# Altium PCB Sch_cube_v3.PcbDoc
Units mil, origin at the board's own origin, x right, y up, seen from the top; angles counter-clockwise.
Board outline 3937.01 x 3937.01 mil, 2 copper layers (Top Layer, Bottom Layer); 58 components, 51 nets, 393 pads, 229 vias.
Unrouted connection lines stored in the file: 53.
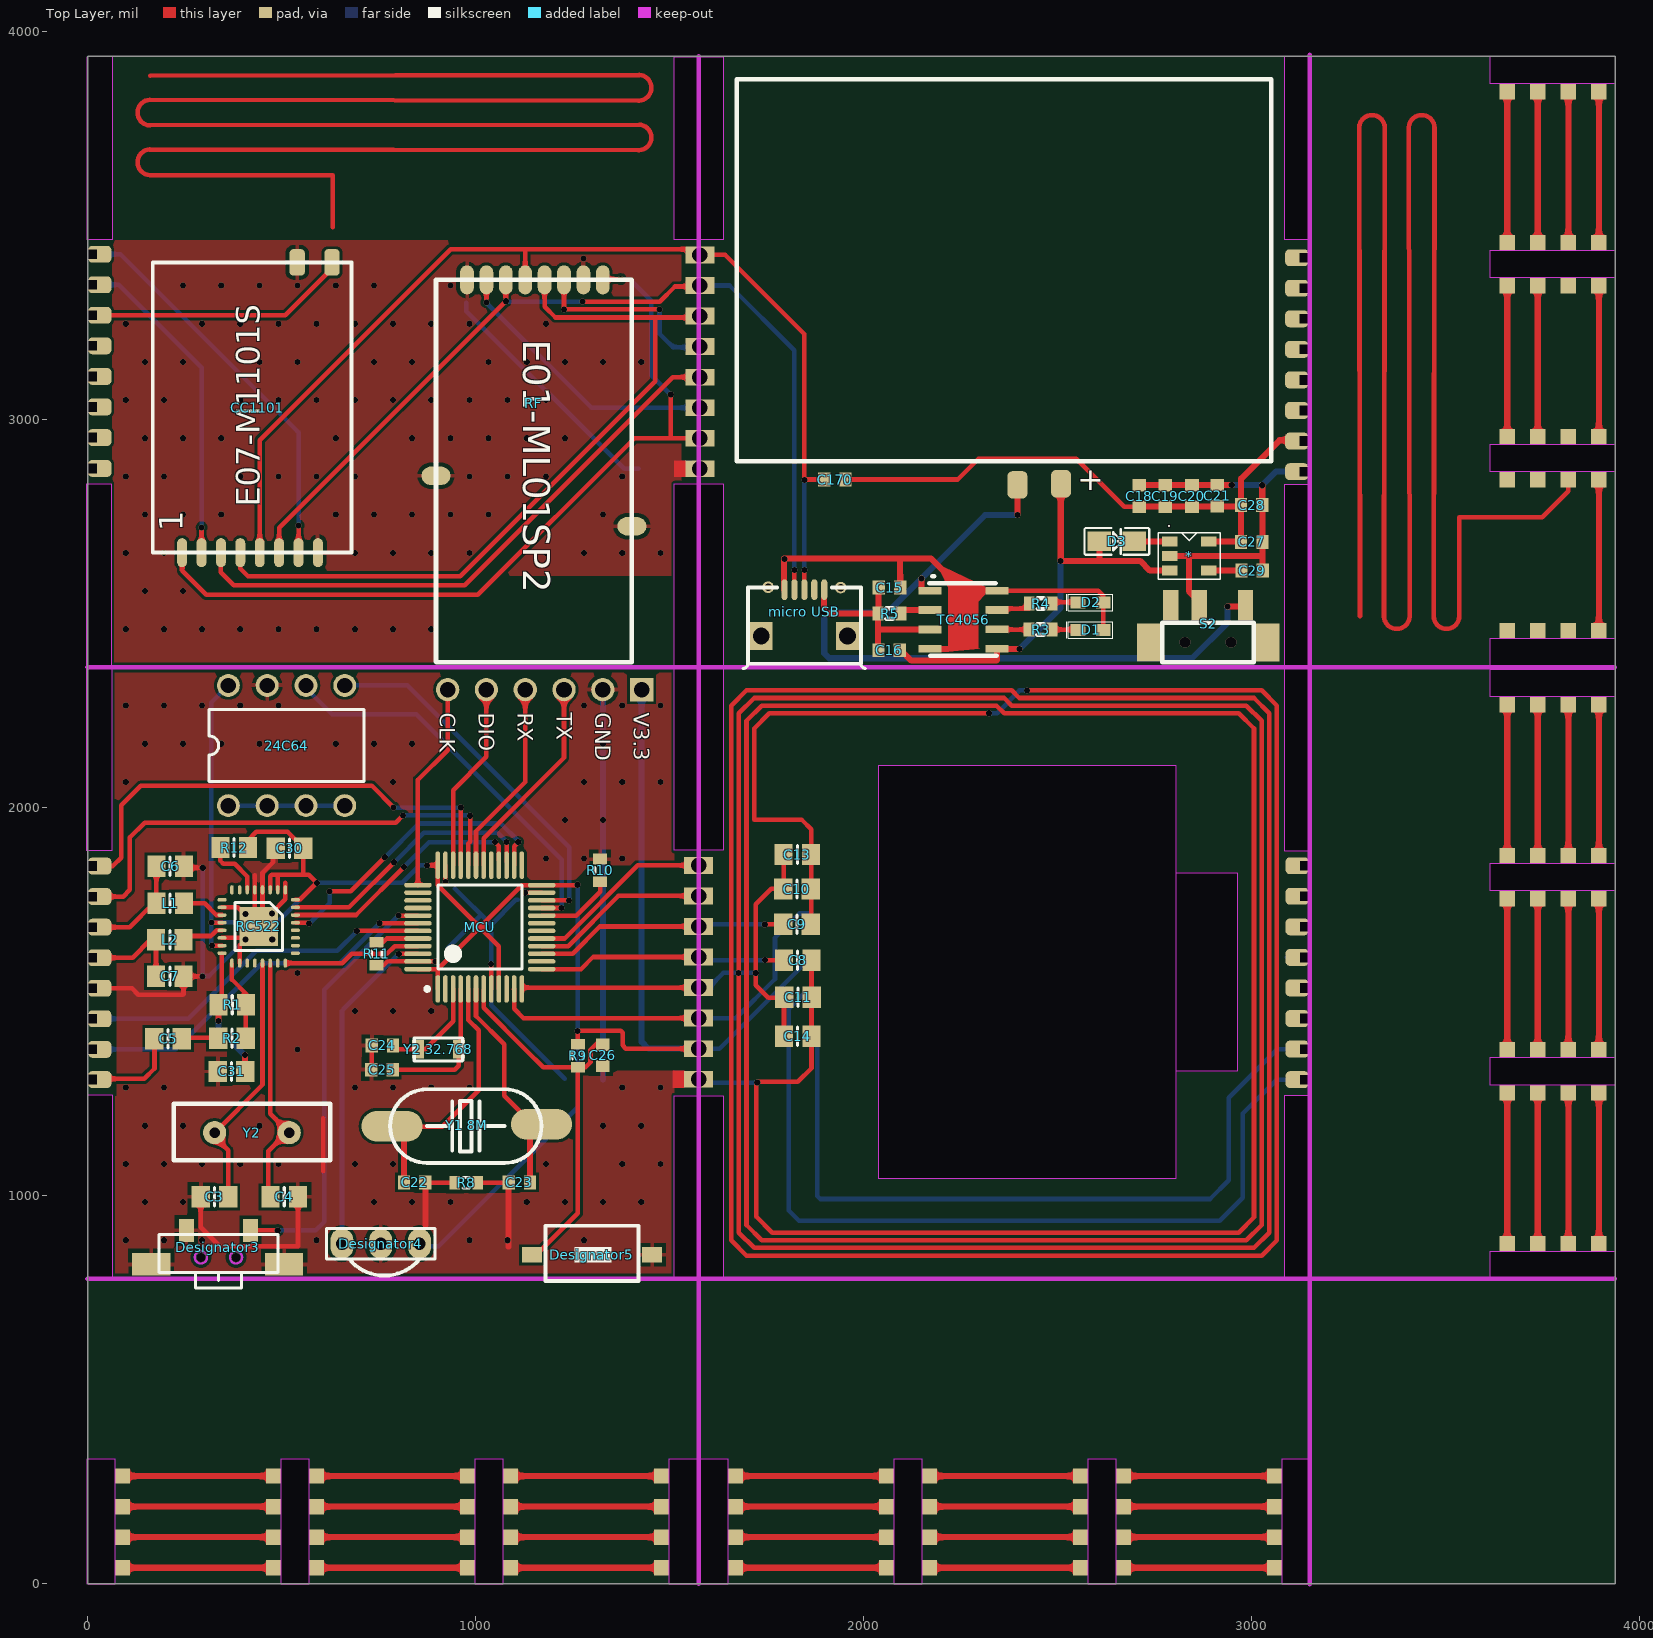
[diagram p0: Top Layer view]
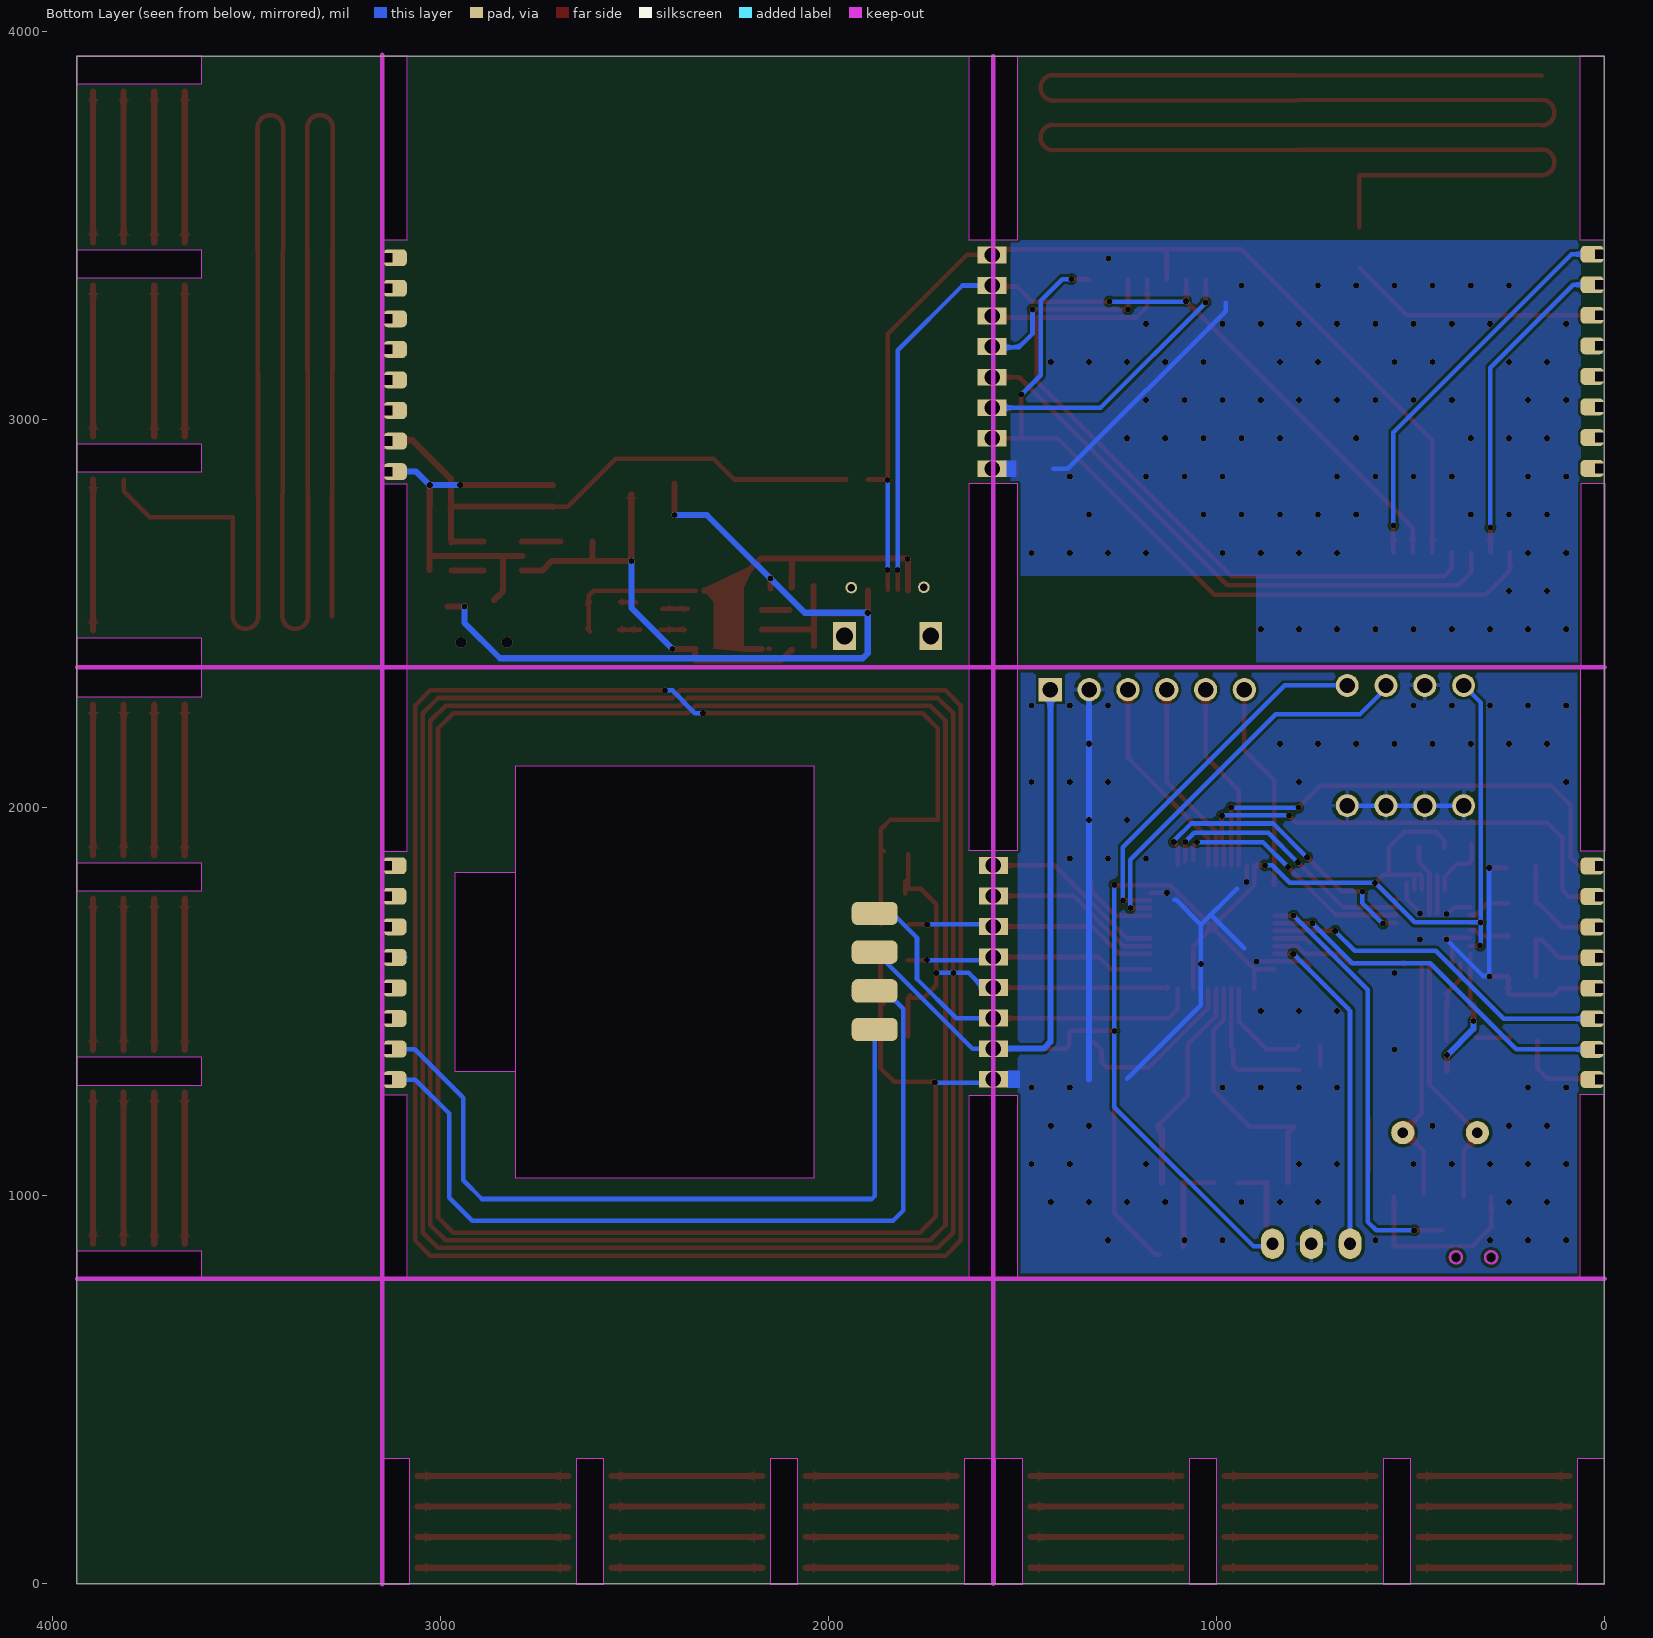
[diagram p1: Bottom Layer view, seen from below]

## Layer stack, top to bottom
Top Solder: solder mask 0.4, Solder Resist, Dk 3.5
Top Layer: signal copper 1.4
Dielectric1: dielectric 12.6, FR-4, Dk 4.8
Bottom Layer: signal copper 1.4
Bottom Solder: solder mask 0.4, Solder Resist, Dk 3.5

## Board outline
0,0 3937.01,0 3937.01,3937.01 0,3937.01
cut-out: 2806.1,1321.85 2806.1,1833.66 2963.58,1833.66 2963.58,1321.85
cut-out: 2038.39,1046.26 2806.1,1046.26 2806.1,2109.25 2038.39,2109.25
cut-out: 1512.03,786.22 1512.03,1258.66 1512.02,1258.22 1638,1258.22 1638,785.78 1638.02,786.22
cut-out: 1512.03,3464.22 1512.03,3936.66 1512.02,3936.22 1638,3936.22 1638,3463.78 1638.02,3464.22
cut-out: 1512.03,1890.44 1512.03,2835.32 1512.02,2835.44 1638,2835.44 1638,1890.56 1638.02,1890.44
cut-out: 3086,786.78 3086,1259.22 3086.98,1259.78 3149.97,1259.78 3149.97,787.34 3148.99,786.78
cut-out: 3085.03,3464.22 3085.03,3936.66 3086.01,3937.22 3149,3937.22 3149,3464.78 3148.02,3464.22
cut-out: -0.47,3464 -0.47,3936.44 0.5,3937 63.5,3937 63.5,3464.56 62.52,3464
cut-out: 0,787.78 0,1260.22 0.98,1260.78 63.97,1260.78 63.97,788.34 62.99,787.78
cut-out: 1579,-0.66 1579,322.17 1649.87,322.17 1650,322.42 1650,-0.42
cut-out: 2079,-0.66 2079,322.17 2149.87,322.17 2150,322.42 2150,-0.42
cut-out: 2579,-0.66 2579,322.17 2649.87,322.17 2650,322.42 2650,-0.42
cut-out: 3079,-0.66 3079,322.17 3149.87,322.17 3150,322.42 3150,-0.42
cut-out: 1499,-0.66 1499,322.17 1569.87,322.17 1570,322.42 1570,-0.42
cut-out: 999,-0.66 999,322.17 1069.87,322.17 1070,322.42 1070,-0.42
cut-out: 499,-0.66 499,322.17 569.87,322.17 570,322.42 570,-0.42
cut-out: -1,-0.66 -1,322.17 69.87,322.17 70,322.42 70,-0.42
cut-out: -1.97,1889.22 -1.97,2361.66 -0.99,2362.22 62,2362.22 62,1889.78 61.02,1889.22
cut-out: -2.5,2362 -2.5,2834.44 -1.52,2835 61.47,2835 61.47,2362.56 60.5,2362
cut-out: 3086,1888.78 3086,2361.22 3086.98,2361.78 3149.97,2361.78 3149.97,1889.34 3148.99,1888.78
cut-out: 3086.03,2361.44 3086.03,2833.88 3087.01,2834.44 3150,2834.44 3150,2362 3149.02,2361.44
cut-out: 3937.66,786 3614.83,786 3614.83,856.87 3614.58,857 3937.42,857
cut-out: 3937.66,1286 3614.83,1286 3614.83,1356.87 3614.58,1357 3937.42,1357
cut-out: 3937.66,1786 3614.83,1786 3614.83,1856.87 3614.58,1857 3937.42,1857
cut-out: 3937.66,2286 3614.83,2286 3614.83,2356.87 3614.58,2357 3937.42,2357
cut-out: 3937.66,3866 3614.83,3866 3614.83,3936.87 3614.58,3937 3937.42,3937
cut-out: 3937.66,3366 3614.83,3366 3614.83,3436.87 3614.58,3437 3937.42,3437
cut-out: 3937.66,2866 3614.83,2866 3614.83,2936.87 3614.58,2937 3937.42,2937
cut-out: 3937.66,2366 3614.83,2366 3614.83,2436.87 3614.58,2437 3937.42,2437

## Design rules (kind name [scope] priority, off if disabled: settings)
AssemblyTestPointUsage [All] p1 off:
AssemblyTestpoint [All] p1 off: testpointundercomponent=TRUE minsize=40 maxsize=100 preferedsize=60 minholesize=0 maxholesize=40 preferedholesize=32 testpointgrid=1 usegrid=TRUE gridtolerance=0.01 allowsidetop=TRUE allowsidebottom=TRUE
Clearance [All] p1: gap=7.87 ignorepadtopadclearanceinfootprint=FALSE except(0: Arc-Hole Track-Hole SMDPad-Hole THPad-Hole Via-Hole Fill-Hole Poly-Hole Region-Hole Text-Hole)
ComponentClearance [All] p1 off: gap=10 collisioncheckmode=3 verticalgap=10 showdistances=FALSE
DiffPairsRouting [All] p1 off: maxlimit=10 minlimit=10 mostfreqgap=10 toplayer_minwidth=15 toplayer_maxwidth=15 toplayer_prefwidth=15 bottomlayer_minwidth=15 bottomlayer_maxwidth=15 bottomlayer_prefwidth=15 maxuncoupledlength=500
FabricationTestPointUsage [All] p1 off: valid=0 allowmultiple=FALSE
FabricationTestpoint [All] p1 off: side=3 testpointundercomponent=TRUE minsize=40 maxsize=100 preferedsize=60 minholesize=0 maxholesize=40 preferedholesize=32 testpointgrid=1 allowsidetop=TRUE allowsidebottom=TRUE usegrid=TRUE gridtolerance=0.01
FanoutControl Fanout_BGA [IsBGA] p1 off: bgadir=Out bgaviamode=Centered fanoutstyle=Auto fanoutdirection=Alternating viagrid=1 // Fanout_BGA (Default Rule)
FanoutControl Fanout_LCC [IsLCC] p2 off: bgadir=Out bgaviamode=Centered fanoutstyle=Auto fanoutdirection=Alternating viagrid=1 // Fanout_LCC (Default Rule)
FanoutControl Fanout_SOIC [IsSOIC] p3 off: bgadir=Out bgaviamode=Centered fanoutstyle=Auto fanoutdirection=Alternating viagrid=1 // Fanout_SOIC (Default Rule)
FanoutControl Fanout_Small [(CompPinCount < 5)] p4 off: bgadir=Out bgaviamode=Centered fanoutstyle=Auto fanoutdirection=OutThenIn viagrid=1 // Fanout_Small (Default Rule)
FanoutControl Fanout_Default [All] p5 off: bgadir=Out bgaviamode=Centered fanoutstyle=Auto fanoutdirection=Alternating viagrid=1 // Fanout_Default (Default Rule)
Height [All] p1 off: minheight=0 maxheight=1000 prefheight=500
HoleSize [All] p1 off: absolutevalues=TRUE maxlimit=100 minlimit=1 maxpercent=80.000 minpercent=20.000
HoleToHoleClearance [All] p1 off: gap=10 allowstackedmicrovias=TRUE
LayerPairs [All] p1 off: enforce=TRUE
MinimumSolderMaskSliver [All] p1 off: minsoldermaskwidth=10
NetAntennae [All] p1 off: netantennaetolerance=0
PasteMaskExpansion [All] p1 off: expansion=0
PlaneConnect [InNet('GND')] p1: planeconnectstyle=Relief reliefexpansion=20 reliefentries=4 reliefconductorwidth=10 reliefairgap=10
PolygonConnect [All] p1: thpad.connectstyle=Relief thpad.reliefconductorwidth=10 thpad.reliefentries=4 thpad.polygonreliefangle="90 Angle" thpad.airgapwidth=10 smdpad.connectstyle=Relief smdpad.reliefconductorwidth=10 smdpad.reliefentries=4 smdpad.polygonreliefangle="90 Angle" smdpad.airgapwidth=10 via.connectstyle=Direct via.reliefconductorwidth=10 via.reliefentries=4 via.polygonreliefangle="45 Angle" via.airgapwidth=10
RoutingCorners [All] p1 off: cornerstyle=45-Degree minsetback=100 maxsetback=100
RoutingLayers [All] p1 off: top layer_v5=TRUE bottom layer_v5=TRUE
RoutingPriority [All] p1 off: routingpriority=0
RoutingTopology [All] p1 off: topology=Shortest
RoutingVias [All] p1 off: holewidth=28 width=50 viastyle="Through Hole" minholewidth=28 minwidth=50 maxholewidth=28 maxwidth=50
ShortCircuit [All] p1 off: allowed=FALSE
SilkToSilkClearance [All] p1 off: silktosilkclearance=10
SilkToSolderMaskClearance [IsPad] p1 off: minsilkscreentomaskgap=10 clearancetoexposedcopper=TRUE
SolderMaskExpansion [All] p1 off: expansion=4
UnRoutedNet [All] p1 off:
UnpouredPolygon [All] p1 off:
Width [All] p1 off: maxlimit=10 minlimit=10 preferedwidth=10
2 further rules are at their usual default settings.

## Classes and differential pairs
component class Sheet1: 24C64 * C3 C4 C5 C6 C7 C8 C9 C10 C11 C13 C14 C15 C16 C18 C19 C20 C21 C22 C23 C24 C25 C26 C27 C28 C29 C30 C31 CC1101 D1 D2 D3 L1 L2 MCU "micro USB" R1 R2 R3 R4 R5 R8 R9 R10 R11 R12 RC522 RF S2 TC4056 U? "Y1 8M" Y2 "Y2 32.768"

## Components (designator, comment, footprint, x,y, rotation, side; value= is the part's Value field where it differs from the comment)
24C64 "24C64" 24C64 363,2006 r90 top
* "RT9103" SOT23-5 2839.19,2649 r90 top
C3 "" 6-0805_N 327,998 r180 top value=15pF
C4 "" 6-0805_N 507,998 r0 top value=15pF
C5 "Cap Semi" 6-0805_N 207.68,1405.51 r180 top value=104pF
C6 "Cap Semi" 6-0805_N 213,1850 r180 top value=47pF
C7 "Cap Semi" 6-0805_N 212,1566 r180 top value=47pF
C8 "" 6-0805_N 1830.3,1608 r0 top value=15pF
C9 "" 6-0805_N 1828.3,1700 r0 top value=15pF
C10 "" 6-0805_N 1828.3,1791 r0 top value=180pF
C11 "" 6-0805_N 1831.3,1512 r180 top value=180pF
C13 "" 6-0805_N 1829.3,1880 r0 top value=10pF
C14 "" 6-0805_N 1830.3,1412 r180 top value=10pF
C15 "" 1608[0603] 2066.93,2567.91 r180 top value=10uF
C16 "" 1608[0603] 2065.94,2406.5 r180 top value=10uF
C18 "" 1608[0603] 2710.24,2803.87 r270 top value=0.1uF
C19 "" 1608[0603] 2777.24,2803.87 r270 top value=0.1uF
C20 "" 1608[0603] 2846.24,2803.87 r270 top value=0.1uF
C21 "" 1608[0603] 2911.24,2804.87 r270 top value=1uF
C22 "" 1608[0603] 843,1035 r180 top value=22pF
C23 "" 1608[0603] 1113,1035 r0 top value=22pF
C24 "" 1608[0603] 760,1388 r0 top value=22pF
C25 "" 1608[0603] 759,1325 r0 top value=22pF
C26 "" 1608[0603] 1327.76,1362.2 r90 top value=0.1uF
C27 "" 1608[0603] 3000.43,2685.65 r0 top value=0.1uF
C28 "" 1608[0603] 3000,2780.51 r0 top value=1uF
C29 "" 1608[0603] 3001.43,2611.83 r180 top value=2.2nF
C30 "" 6-0805_N 520.67,1895.67 r180 top value=2.2nF
C31 "" 6-0805_N 371.06,1320.87 r0 top value=2.2nF
C170 "" 1608[0603] 1926.18,2846.46 r0 top value=10uF (schematic designator C17)
CC1101 "Component_1" CC1101 680,2658 r90 top
D1 "LED3" 标准1608(C0603) 2586.04,2459.72 r180 top
D2 "LED3" 标准1608(C0603) 2586.04,2530.59 r180 top
D3 "D Zener" 0805D 2647.64,2687.01 r0 top
Designator3 "Comment" SW3 254.92,911.42 r0 top
Designator4 "Comment" IR立式 655.51,876.97 r0 top
Designator5 "Comment" 贴片按键 1180.12,923.23 r0 top
L1 "Inductor" 6-0805_N 213,1754 r0 top value=2.2uH
L2 "Inductor" 6-0805_N 212,1660 r0 top value=2.2uH
MCU "STM32F100C8T6B" LQFP48_N 1011,1693 r90 top
"micro USB" "Component_1" "micro USB" 1847.44,2502.95 r180 top
R1 "Res3" 6-0805_N 373,1493 r0 top value=820R
R2 "Res3" 6-0805_N 372.05,1406.5 r180 top value=5.1K
R3 "Res3" J1-0603 2456.12,2459.72 r0 top value=1K
R4 "Res3" J1-0603 2456.33,2526.78 r0 top value=1K
R5 "Res3" J1-0603 2066.93,2500.98 r180 top value=1.2K
R8 "Res3" J1-0603 976,1034 r0 top value=10M
R9 "Res3" J1-0603 1263.78,1361.22 r270 top value=10K
R10 "Res3" J1-0603 1321,1839 r90 top value=1.5K
R11 "Res3" J1-0603 745,1624 r270 top value=10K
R12 "Res3" 6-0805_N 378,1898.05 r180 top value=10K
RC522 "" RC522 510,1789 r270 top
RF "Component_1" E01-ML01SP2 898,2377 r0 top
S2 "SW-SPST" 拨动开关 2887.8,2425.2 r0 top
TC4056 "Component_1" TC4056电源IC 2171.26,2560.04 r270 top
"Y1 8M" "XTAL" 49SMD 975,1180 r0 top
Y2 "27MHz" 直插晶振 620,1246 r180 top
"Y2 32.768" "XTAL" 32.768K晶振 842,1348 r0 top

## Footprints (in the part's own frame and the unit in brackets; to place one, negate y for a bottom-side part, rotate by r counter-clockwise, add the part's x,y. Pads: shape width x height; smd on the part's side, far side on the other; paste and mask are expansions set on the pad)
6-0805_N [mm] "Chip Resistor, Body 2.0x1.2mm, IPC Medium Density"
  rect 1.2x1.4 smd: 1(-0.9,0) 2(0.9,0)
  silkscreen extent 0,-0.6 0,0.6, body extent -1.07,-0.7 1.07,0.7, height 0.7
24C64 [mm]
  round 1.5 hole 1: 1(0,0) 2(0,-2.54) 3(0,-5.08) 4(0,-7.62) 5(7.87,-7.62) 6(7.87,-5.08) 7(7.87,-2.54) 8(7.87,0)
  silkscreen extent 1.58,-8.89 6.29,1.27
32.768K晶振 [mil]
  rect 31.5x47.24 smd: 1(10,30) 2(115,30)
  silkscreen extent 0,0 125,59
49SMD [mm]
  oval 4x2 smd: 1(-4.826,0) 2(4.953,0.127)
  silkscreen extent -4.95,-2.41 4.95,2.41
0805D [mil]
  rect 60x50 smd: 1(-40,0) 2(50,0)
  silkscreen extent -78,-34 89,34
1608[0603] [mm] "Chip Capacitor, Body 1.6x0.8mm, IPC High Density"
  rect 0.8x0.9 smd: 1(-0.7,0) 2(0.7,0)
  body extent -0.87,-0.48 0.87,0.48, height 1.3
CC1101 [mm]
  oval 1.9x0.65 smd: 2(0,11.08) 2(0,9.81) 2(0,8.54) 2(0,7.27) 2(0,6) 2(0,4.73) 2(0,3.46) 2(0,2.19)
  rrect50% 1.73x1 smd: 2(19,1.27) 2(19,3.548)
  silkscreen extent 0,0 19,13
E01-ML01SP2 [mm]
  oval 0.9x1.9 smd: 0(2.032,24.994) 0(3.302,24.994) 0(4.572,24.994) 0(5.842,24.994) 0(7.112,24.994) 0(8.382,24.994) 0(9.652,24.994) 0(10.922,24.994)
  oval 1.9x1.2 smd: 1(0,12.167) 1(12.827,8.865)
  silkscreen extent 0,-0.03 12.83,24.99
IR立式 [mm]
  oval 1.5x2 hole 0.8: 1(0,0) 2(2.54,0) 3(5.08,0)
  silkscreen extent -1,-2.09 6.1,1
J1-0603 [mm] "Chip Resistor, Body 1.6x0.8mm, IPC High Density"
  rect 0.7x0.9 smd: 1(-0.75,0) 2(0.75,0)
  silkscreen extent -0.2,-0.35 0.2,0.35, body extent -0.85,-0.48 0.85,0.48, height 0.9
LQFP48_N [mm]
  oval 1.8x0.3 smd: 1(-4.05,2.75) 2(-4.05,2.25) 3(-4.05,1.75) 4(-4.05,1.25) 5(-4.05,0.75) 6(-4.05,0.25) 7(-4.05,-0.25) 8(-4.05,-0.75) 9(-4.05,-1.25) 10(-4.05,-1.75) 11(-4.05,-2.25) 12(-4.05,-2.75) 25(4.05,-2.75) 26(4.05,-2.25) 27(4.05,-1.75) 28(4.05,-1.25) 29(4.05,-0.75) 30(4.05,-0.25) 31(4.05,0.25) 32(4.05,0.75) 33(4.05,1.25) 34(4.05,1.75) 35(4.05,2.25) 36(4.05,2.75)
  oval 0.3x1.8 smd: 13(-2.75,-4.05) 14(-2.25,-4.05) 15(-1.75,-4.05) 16(-1.25,-4.05) 17(-0.75,-4.05) 18(-0.25,-4.05) 19(0.25,-4.05) 20(0.75,-4.05) 21(1.25,-4.05) 22(1.75,-4.05) 23(2.25,-4.05) 24(2.75,-4.05) 37(2.75,4.05) 38(2.25,4.05) 39(1.75,4.05) 40(1.25,4.05) 41(0.75,4.05) 42(0.25,4.05) 43(-0.25,4.05) 44(-0.75,4.05) 45(-1.25,4.05) 46(-1.75,4.05) 47(-2.25,4.05) 48(-2.75,4.05)
  silkscreen extent -4.17,-2.75 2.75,3.57
"micro USB" [mm]
  oval 0.4x1.35 smd: 1(-1.3,-1.515) 2(-0.65,-1.515) 3(0,-1.515) 4(0.65,-1.515) 5(1.3,-1.515)
  rect 1.5x1.85 hole 1.1: 6(2.825,1.515) 8(-2.825,1.515)
  round 0.762 hole 0.5: 21(-2.375,-1.65) 21(2.375,-1.675)
  silkscreen extent -4,-1.66 4,3.63
RC522 [mm]
  oval 0.6x0.23 smd: 1(0,0) 2(0,-0.5) 3(0,-1) 4(0,-1.5) 5(0,-2) 6(0,-2.5) 7(0,-3) 8(0,-3.5) 17(4.8,-3.5) 18(4.8,-3) 19(4.8,-2.5) 20(4.8,-2) 21(4.8,-1.5) 22(4.8,-1) 23(4.8,-0.5) 24(4.8,0)
  oval 0.23x0.6 smd: 9(0.65,-4.15) 10(1.15,-4.15) 11(1.65,-4.15) 12(2.15,-4.15) 13(2.65,-4.15) 14(3.15,-4.15) 15(3.65,-4.15) 16(4.15,-4.15) 25(4.15,0.65) 26(3.65,0.65) 27(3.15,0.65) 28(2.65,0.65) 29(2.15,0.65) 30(1.65,0.65) 31(1.15,0.65) 32(0.65,0.65)
  rect 2.54x2.54 smd: 21(2.4,-1.75)
  silkscreen extent 0.83,-3.31 3.96,-0.18
SOT23-5 [mil]
  rect 26x40 smd: 1(37.4,50) 2(0,50) 3(-37.4,50) 4(-37.4,-50) 5(37.4,-50)
  silkscreen extent -60,-80 60,80
SW3 [mm]
  rect 1x1.5 smd: 1(0,0) 2(4.19,0)
  rect 2.5x1.5 smd: 3(-2.305,-2.217) 4(6.395,-2.217)
  Keep-Out Layer circle w0.15: c3.245,-1.767 r0.4
  Keep-Out Layer circle w0.15: c0.945,-1.767 r0.4
  silkscreen extent -1.8,-3.77 6,-0.27
TC4056电源IC [mm]
  rect 0.5x1.5 smd: 1(0,0) 2(1.27,0) 3(2.54,0) 4(3.81,0) 5(3.805,4.375) 6(2.535,4.375) 7(1.265,4.375) 8(-0.005,4.375)
  silkscreen extent -0.95,-0.06 4.25,4.36
拨动开关 [mm]
  rect 1.524x2.5 smd: 26(-3.9,0.025) 26(3.9,0.025)
  rect 1x2 smd: 27(-2.45,2.475) 27(-0.575,2.475) 27(2.45,2.475)
  silkscreen extent -3,-1.28 3,1.33
标准1608(C0603) [mm]
  rect 0.965x0.8 smd: 1(-0.8,0.025) 2(0.85,0.025)
  silkscreen extent -1.43,-0.53 1.6,0.58
直插晶振 [mm]
  round 1.524 hole 0.7: 21(2.55,2.1) 21(7.43,2.1)
  silkscreen extent -0.15,0.2 10.1,3.9
贴片按键 [mm]
  rect 1.3x1 smd: 1(6.985,-1.905) 2(-0.889,-1.905)
  silkscreen extent 0,-3.62 6.1,0

## Part data
C3 C4 C8 C9 C10 C11 C13 C14 C15 C16 C18 C19 C20 C21 C22 C23 C24 C25 C26 C27 C28 C29 C30 C31 C170: library part "Cap Semi", "Capacitor (Semiconductor SIM Model)", LatestRevisionDate=29-May-2009, LatestRevisionNote="IPC-7351 Footprint Added.", PackageDescription="Chip Capacitor", PackageReference=C1206, Published=8-Jun-2000, Publisher="Altium Limited"
C5 C6 C7: "Capacitor (Semiconductor SIM Model)", LatestRevisionDate=29-May-2009, LatestRevisionNote="IPC-7351 Footprint Added.", PackageDescription="Chip Capacitor", PackageReference=C1206, Published=8-Jun-2000, Publisher="Altium Limited"
D1 D2: "Typical BLUE SiC LED", DatasheetVersion=16-Apr-2002, LatestRevisionDate=17-Dec-2003, LatestRevisionNote="PCB Footprint replaced.", PackageDescription="SM LED; 2 C-Bend Leads; Body 3.5 x 2.8 x 1.9 mm, inc leads (LxWxH typ)", PackageReference=3.5X2.8X1.9, PackageVersion=16-Apr-2002, Published=8-Jun-2000, Publisher="Altium Limited"
D3: "Zener Diode", LatestRevisionDate=17-Jul-2002, LatestRevisionNote="Re-released for DXP Platform.", PackageDescription="Diode, Thru-Hole; 2 Leads; 0.7 in Pin Spacing", PackageReference=DIODE-0.7, Published=8-Jun-2000, Publisher="Altium Limited"
MCU: "ARM Cortex-M3 32-bit MCU, 64 KB Flash, 8 KB Internal RAM, 37 I/Os, 48-pin LQFP, -40 to 85 degC, Tray", I/Os (High Current)=37, Operating Frequency(F) (Processor speed) (MHz)=24, Supplier Part Number 1=497-10499-ND, Supply Voltage(Vcc) min (V)=2, A/D Converter="1x12-bit (10 Channel)", ComponentLink1Description="Manufacturer URL", ComponentLink1URL=http://www.st.com/web/en/home.html, ComponentLink2Description=Datasheet, ComponentLink2URL=http://www.st.com/st-web-ui/static/active/en/resource/technical/document/datasheet/CD00251732.pdf, ComponentLink3Description="Package Specification", ComponentLink3URL=http://www.st.com/st-web-ui/static/active/en/resource/technical/document/datasheet/DM00058181.pdf, Core="ARM Cortex-M3", D/A Converter="2x12-bit (2 Channel)", DatasheetVersion="Rev. 7", FLASH Size (Prog) (kB)=64, Internal RAM Size (kB)=8, Mounting Technology="Surface Mount", PackageDescription="48-Pin Low Profile Quad Flat Package, 7 x 7 mm Body, 0.5 mm Pitch", PackageReference=LQFP48, PackageVersion="Rev. 6, 06/2013", Packing=Tray, PartNumber=STM32F100C8T6B, Supplier 1=Digi-Key, Supplier 2=Farnell, Supplier 3=Newark, Supplier 4=Mouser, Supplier Part Number 2=1838511, Supplier Part Number 3=76R0988, Supplier Part Number 4=511-STM32F100C8T6B
R1 R2 R3 R4 R5 R8 R9 R10 R11 R12: "Resistor", LatestRevisionDate=29-May-2009, LatestRevisionNote="IPC-7351 Footprint Added.", PackageDescription="Chip Resistor", PackageReference=J1-0603, Published=8-Jun-2000, Publisher="Altium Limited"
RC522: library part Component_1
S2: "Single-Pole, Single-Throw Switch", LatestRevisionDate=17-Jul-2002, LatestRevisionNote="Re-released for DXP Platform.", PackageDescription="Switch; 2 Leads", PackageReference=SPST-2, Published=24-Mar-1999, Publisher="Altium Limited"
"Y1 8M" "Y2 32.768": "Crystal Oscillator", LatestRevisionDate=17-Jul-2002, LatestRevisionNote="Re-released for DXP Platform.", PackageDescription="Crystal, Thru-Hole; 2 Leads; Body 3.1 x 8.2 mm (Dia.xH)", PackageReference=R38, Published=8-Jun-2000, Publisher="Altium Limited"
Y2: library part XTAL, "Crystal Oscillator", LatestRevisionDate=17-Jul-2002, LatestRevisionNote="Re-released for DXP Platform.", PackageDescription="Crystal, Thru-Hole; 2 Leads; Body 3.1 x 8.2 mm (Dia.xH)", PackageReference=R38, Published=8-Jun-2000, Publisher="Altium Limited"
L1 L2: Code_IEC=1005, Code_JEITA=0402, LatestRevisionDate=29-May-2009, LatestRevisionNote="IPC-7351 Footprint Added.", PackageDescription="Chip Inductor", PackageReference=0402-A, Published=8-Jun-2000, Publisher="Altium Limited"

## Free pads (board coordinates)
  rrect50% 60x43.31 hole 23.62 square copper offset 19.68,0: 14(11.73,1300) 14(11.76,1377.88) 14(11.76,1456.62) 14(11.76,1535.36) 14(11.76,1614.1) 14(11.76,1692.84) 14(11.76,1771.58) 14(11.76,1850.32) 14(11.81,2875) 14(11.81,2954.68) 14(11.81,3033.42) 14(11.81,3112.16) 14(11.81,3190.9) 14(11.81,3269.64) 14(11.81,3348.38) 14(11.81,3427.12)
  rrect50% 60x43.31 hole 23.62 square copper offset -19.68,0: 14(3136.32,2866.82) 14(3136.32,2945.56) 14(3136.32,3024.3) 14(3136.32,3103.04) 14(3136.32,3181.78) 14(3136.32,3260.52) 14(3136.32,3339.26) 14(3136.32,3418) 14(3137.24,1299.82) 14(3137.24,1378.56) 14(3137.24,1457.3) 14(3137.24,1536.04) 14(3137.24,1614.78) 14(3137.24,1693.52) 14(3137.24,1772.26) 14(3137.24,1851)
  rect 74.8x43.31 hole 39.37: 18(1575.05,1300.84) 18(1575.05,1379.58) 18(1575.05,1458.32) 18(1575.05,1537.06) 18(1575.05,1615.8) 18(1575.05,1694.54) 18(1575.05,1773.28) 18(1575.05,1852.02) 18(1578,2874.04) 18(1578,2952.78) 18(1578,3031.52) 18(1578,3110.26) 18(1578,3189) 18(1578,3267.74) 18(1578,3346.48) 18(1578,3425.22)
  rrect50% 51.18x70.87 smd: 19(2396.65,2832.68) 19(2508.86,2835.63)
  rect 39.37x39.37 smd: 20(90,41.96) 20(90,120.7) 20(90,199.44) 20(90,278.18) 20(479,41.96) 20(479,120.7) 20(479,199.44) 20(479,278.18) 20(590,41.96) 20(590,120.7) 20(590,199.44) 20(590,278.18) 20(979,41.96) 20(979,120.7) 20(979,199.44) 20(979,278.18) 20(1090,41.96) 20(1090,120.7) 20(1090,199.44) 20(1090,278.18) 20(1479,41.96) 20(1479,120.7) 20(1479,199.44) 20(1479,278.18) 20(1670,41.96) 20(1670,120.7) 20(1670,199.44) 20(1670,278.18) 20(2059,41.96) 20(2059,120.7) 20(2059,199.44) 20(2059,278.18) 20(2170,41.96) 20(2170,120.7) 20(2170,199.44) 20(2170,278.18) 20(2559,41.96) 20(2559,120.7) 20(2559,199.44) 20(2559,278.18) 20(2670,41.96) 20(2670,120.7) 20(2670,199.44) 20(2670,278.18) 20(3059,41.96) 20(3059,120.7) 20(3059,199.44) 20(3059,278.18) 20(3658.82,877) 20(3658.82,1266) 20(3658.82,1377) 20(3658.82,1766) 20(3658.82,1877) 20(3658.82,2266) 20(3658.82,2457) 20(3658.82,2846) 20(3658.82,2957) 20(3658.82,3346) 20(3658.82,3457) 20(3658.82,3846) 20(3737.56,877) 20(3737.56,1266) 20(3737.56,1377) 20(3737.56,1766) 20(3737.56,1877) 20(3737.56,2266) 20(3737.56,2457) 20(3737.56,2846) 20(3737.56,2957) 20(3737.56,3346) 20(3737.56,3457) 20(3737.56,3846) 20(3816.3,877) 20(3816.3,1266) 20(3816.3,1377) 20(3816.3,1766) 20(3816.3,1877) 20(3816.3,2266) 20(3816.3,2457) 20(3816.3,2846) 20(3816.3,2957) 20(3816.3,3346) 20(3816.3,3457) 20(3816.3,3846) 20(3895.04,877) 20(3895.04,1266) 20(3895.04,1377) 20(3895.04,1766) 20(3895.04,1877) 20(3895.04,2266) 20(3895.04,2457) 20(3895.04,2846) 20(3895.04,2957) 20(3895.04,3346) 20(3895.04,3457) 20(3895.04,3846)
  rrect50% 118.11x60 smd far side: 21(1880.91,1429.13) 21(1880.91,1528.74) 21(1880.91,1628.35) 21(1880.91,1727.95)
  round 60 hole 40.16: GND(928,2305) GND(1028,2305) GND(1128,2305) GND(1228,2305) GND(1328,2305)
  rect 60x60 hole 40.16: GND(1427.99,2305)

## Via types
v1: diameter 15.75, hole 15.75, Top Layer to Bottom Layer, tented both sides, 225 vias
v2: diameter 23.62, hole 23.62, Top Layer to Bottom Layer, 2 vias
v3: diameter 28, hole 28, Top Layer to Bottom Layer, 2 vias

## Nets (pads, with @x,y where several pads share a name; then routed paths per layer and width w, separated by ;. In a path a pad name is that pad's centre, name@x,y a point inside that pad or via, vN(x,y) a via of type N, cw(c..) or ccw(c..) an arc to the next point about the centre after c; other vN are vias at no path point)
GND: 24C64.1 24C64.2 24C64.3 24C64.4 24C64.7 "micro USB.1" *.2 C3.2 C4.2 C6.1 C7.1 C10.1 C11.2 C13.1 C14.2 C15.2 C16.2 C18.1 C19.1 C20.1 C21.1 C22.1 C23.1 C24.1 C25.1 C26.1 C29.1 C30.2 C31.1 CC1101.2@540.3,3406.03 CC1101.2@593.78,2658 Designator3.1 Designator3.3 Designator3.4 Designator4.2 Designator5.1 pad.18@1575.05,1300.84 pad.18@1578,2874.04 pad.GND@1328,2305 R5.2 R8.1 R8.2 R10.2 RC522.1 RC522.4 RC522.5 RF.0@978,3361 RF.0@1278,3361 RF.1 TC4056.1 TC4056.3 | length 6962.3
  Top Layer w11.81: 11.76,1535.36 114.64,1535.36 131,1519 245.87,1519 ; 247.43,1520.57 C7.1 v1(296,1566) ; C6.1@252.43,1846 v1(297,1846) ; C3.2 291.57,919.43 340.74,870.26 ; 340.55,870.08 542.43,870.08 C4.2 ; RC522.5@431.1,1783.09 431.1,1827.04 ; 431.26,1728.26 RC522.5 ; 450.95,1725.06 RC522.4 450.95,1832.94 478,1860 C30.2@478,1901 ; v1@478,1733 510,1765 RC522.1 510,1807 ; 608,1063.57 608,1200 ; C25.1@732.44,1337.44 C24.1 ; 1040.53,1533.55 v1@1040.53,1597.47
  Top Layer w15.75: 870.56,925.2 C22.1 ; 1084.44,870.08 C23.1@1084.44,1034 ; v1@1898.05,2503.43 1898.05,2560.71 ; v1@1900.49,2500.98 R5.2 C16.2@2037.4,2417.32 ; R5.2@2038.63,2505.66 C15.2@2038.63,2572 ; 2041.73,2460.04 TC4056.3 ; 2710.24,2776.32 2974.39,2777.63 ; v1(2937.99,2519.68) 2981.3,2519.68
  Bottom Layer w11.81: v1(297,1846) 297,1567 313,1567 v1(407,1661) ; 24C64.1 24C64.4 ; 928.5,1638.5 1015,1725 ; 947,1792 1040,1699 ; 976.38,3302.17 976.38,3280.51 1382.85,2874.04 1420,2874.04 ; 1109,1763 1104,1763 1040,1699 ; 1230,1302 1040,1492 v1(1040,1598) 1040,1699
  Bottom Layer w15.75: 1328,1300.84 pad.GND@1328,2305 ; v1(1898.62,2502.95) 1898.62,2398.62 1911.42,2385.83 2846.46,2385.83 2937.99,2477.36 v1(2937.99,2519.68)
  other v1: 98.43,885.83 196.85,885.83 295.28,885.83 590.55,885.83 984.25,885.83 1082.68,885.83 1279.53,885.83 147.64,984.25 246.06,984.25 738.19,984.25 836.61,984.25 935.04,984.25 1131.89,984.25 1230.32,984.25 1328.74,984.25 1427.17,984.25 98.43,1082.68 196.85,1082.68 295.28,1082.68 393.7,1082.68 492.13,1082.68 688.98,1082.68 787.4,1082.68 1181.1,1082.68 1377.95,1082.68 1476.38,1082.68 147.64,1181.1 246.06,1181.1 442.91,1181.1 1328.74,1181.1 1427.17,1181.1 98.43,1279.53 196.85,1279.53 688.98,1279.53 787.4,1279.53 885.83,1279.53 984.25,1279.53 1377.95,1279.53 1476.38,1279.53 541.34,1377.95 688.98,1476.38 787.4,1476.38 885.83,1476.38 541.34,1574.8 896.42,1604.42 476,1661 407,1727 475,1728 1127.58,1781.58 922.42,1809.58 1181.1,1870.08 1279.53,1870.08 1377.95,1870.08 1230.32,1968.51 1328.74,1968.51 98.43,2066.93 787.4,2066.93 1279.53,2066.93 1377.95,2066.93 1476.38,2066.93 147.64,2165.36 246.06,2165.36 344.49,2165.36 442.91,2165.36 541.34,2165.36 639.76,2165.36 738.19,2165.36 836.61,2165.36 1328.74,2165.36 98.43,2263.78 196.85,2263.78 295.28,2263.78 393.7,2263.78 492.13,2263.78 1279.53,2263.78 1377.95,2263.78 1476.38,2263.78 98.43,2460.63 196.85,2460.63 295.28,2460.63 393.7,2460.63 492.13,2460.63 590.55,2460.63 688.98,2460.63 787.4,2460.63 885.83,2460.63 147.64,2559.06 246.06,2559.06 98.43,2657.48 196.85,2657.48 688.98,2657.48 787.4,2657.48 885.83,2657.48 984.25,2657.48 1181.1,2657.48 1279.53,2657.48 1377.95,2657.48 1476.38,2657.48 147.64,2755.91 246.06,2755.91 344.49,2755.91 639.76,2755.91 738.19,2755.91 836.61,2755.91 935.04,2755.91 1033.46,2755.91 1328.74,2755.91 98.43,2854.33 196.85,2854.33 393.7,2854.33 492.13,2854.33 590.55,2854.33 688.98,2854.33 984.25,2854.33 1082.68,2854.33 1181.1,2854.33 1377.95,2854.33 147.64,2952.76 246.06,2952.76 344.49,2952.76 639.76,2952.76 836.61,2952.76 935.04,2952.76 1033.46,2952.76 1131.89,2952.76 1230.32,2952.76 98.43,3051.18 196.85,3051.18 393.7,3051.18 492.13,3051.18 590.55,3051.18 688.98,3051.18 787.4,3051.18 885.83,3051.18 984.25,3051.18 1082.68,3051.18 1181.1,3051.18 147.64,3149.61 246.06,3149.61 442.91,3149.61 541.34,3149.61 738.19,3149.61 836.61,3149.61 1033.46,3149.61 1131.89,3149.61 1230.32,3149.61 1328.74,3149.61 1427.17,3149.61 98.43,3248.03 295.28,3248.03 393.7,3248.03 492.13,3248.03 590.55,3248.03 688.98,3248.03 787.4,3248.03 885.83,3248.03 984.25,3248.03 1181.1,3248.03 246.06,3346.46 344.49,3346.46 442.91,3346.46 541.34,3346.46 639.76,3346.46 738.19,3346.46 935.04,3346.46 1278,3416
Net1: MCU.13
Net2: MCU.14
Net3: MCU.15
Net4: MCU.16
Net5: MCU.17
Net24C64_5: 24C64.5 MCU.22 | length 70.6
  Top Layer w11.81: MCU.22 1241,1762
Net24C64_6: 24C64.6 MCU.21
Net8205A_1: 
Net8205A_8: 
Net*_1: *.1 D3.2 pad.GND@928,2305
Net*_3: *.3 C16.1 D3.1 TC4056.5
Net*_4: *.4 C29.2
Net*_5: *.5 C27.2 C28.2
NetC3_1: C3.1 RC522.22
NetC4_1: C4.1
NetC5_1: C5.1 C8.2 C11.1 C14.1
NetC5_2: C5.2 R2.1
NetC8_1: C8.1 L2.1
NetC9_1: C9.1 C10.2 C13.2
NetC9_2: C9.2 L1.1
NetC15_1: "micro USB.5" C15.1 TC4056.4 | length 153.5
  Top Layer w15.75: 1795.28,2561.12 1795.28,2642.72 ; 2093.5,2639.76 C15.1
NetC17_1: 
NetC17_2: 
NetC22_2: "Y1 8M.1" C22.2
NetC23_2: "Y1 8M.2" C23.2
NetC24_2: "Y2 32.768.1" C24.2
NetC25_2: "Y2 32.768.2" C25.2
NetC26_2: C26.2 MCU.7 R9.2 | length 200.7
  Top Layer w11.81: MCU.7@1020.69,1531.46 1020.69,1485.31 1021,1485 1130,1376
NetC27_1: C27.1 C28.1
NetC31_2: C31.2 R1.2 R2.2 RC522.16
NetD1_2: D1.2 R3.2 | length 53.1
  Top Layer w11.81: R3.2 D1.2@2538.8,2459.72
NetD2_2: D2.2 R4.2 | length 40.8
  Top Layer w11.81: R4.2@2495.49,2530.59 2534.86,2530.59 D2.2@2535.84,2531.57
NetD4_1: 
NetD5_1: 
NetD6_1: 
NetD7_1: 
NetD8_1: 
NetDWO1V_15: 
NetL1_2: L1.2 RC522.11
NetL2_2: L2.2 RC522.13
NetMCU_20: MCU.20 R11.1
NetMCU_42: MCU.42 | length 98.6
  Top Layer w11.81: 752.95,1702.78 MCU.42
NetMCU_44: MCU.44 R10.1
NetR1_1: R1.1 RC522.17
NetR5_1: R5.1 TC4056.2
NetR12_2: R12.2 RC522.6
NetRC522_14: RC522.14
NetS2_2: 
VCC3.3: 24C64.8 C18.2 C19.2 C20.2 C21.2 C30.1 pad.14@3136.32,2866.82 R9.1 R12.1 RC522.2 RC522.3 RC522.12 RC522.15 | length 1183.5
  Top Layer w11.81: R12.1@413.43,1917.37 435.04,1938.98 515.5,1938.98 556.43,1898.05 556.43,1828.57 ; 490,1828 570,1828 ; 851.55,1584.73 899.73,1584.73 ; 902.73,1533.55 902.73,1581.73 ; 902.73,1584.73 1011,1693 ; 902.73,1801.27 1011,1693 ; 1060.21,1533.55 1060.21,1643.79 1011,1693 ; 1119.27,1801.27 1011,1693
  Bottom Layer w15.75: 1445.42,1379.58 1575.05,1379.58
VCC5.0: D1.1 D2.1 TC4056.8 | length 397.1
  Top Layer w11.81: 1263.78,955.71 1263.78,1331.69 ; D1.1@2613.6,2454.8 D1.1@2622.05,2463.25 ; D2.1@2615.57,2531.57 D2.1@2622.05,2525.09
  other v1: 2401.57,2409.45
pads on no net: "micro USB.2" "micro USB.3" "micro USB.4" "micro USB.6" "micro USB.8" "micro USB.21" C6.2 C7.2 C170.1 C170.2 CC1101.2@243.78,2658 CC1101.2@293.78,2658 CC1101.2@343.78,2658 CC1101.2@393.78,2658 CC1101.2@443.78,2658 CC1101.2@493.78,2658 CC1101.2@543.78,2658 CC1101.2@630,3406.03 Designator3.2 Designator4.1 Designator4.3 Designator5.2 MCU.1 MCU.2 MCU.3 MCU.4 MCU.5 MCU.6 MCU.8 MCU.9 MCU.10 MCU.11 MCU.12 MCU.18 MCU.19 MCU.23 MCU.24 MCU.25 MCU.26 MCU.27 MCU.28 MCU.29 MCU.30 MCU.31 MCU.32 MCU.33 MCU.34 MCU.35 MCU.36 MCU.37 MCU.38 MCU.39 MCU.40 MCU.41 MCU.43 MCU.45 MCU.46 MCU.47 MCU.48 R3.1 R4.1 R11.2 RC522.7 RC522.8 RC522.9 RC522.10 RC522.18 RC522.19 RC522.20 RC522.21 RC522.23 RC522.24 RC522.25 RC522.26 RC522.27 RC522.28 RC522.29 RC522.30 RC522.31 RC522.32 RF.0@1028,3361 RF.0@1078,3361 RF.0@1128,3361 RF.0@1178,3361 RF.0@1228,3361 RF.0@1328,3361 S2.26 S2.27 TC4056.6 TC4056.7 Y2.21
copper on no net: | length 103678.7
  Top Layer w0: v1@1261.44,1421.44 v1@1266,1426
  Top Layer w11.81: 11.73,1302 146,1302 172.57,1328.57 172.57,1400 ; 11.76,1614.1 116.1,1614.1 162,1660 176.57,1660 176.57,1566 ; 11.76,1771.58 91.58,1771.58 109,1789 109,1924 147,1962 794,1962 v1(813,1981) ; 11.76,1850.32 65.32,1850.32 87,1872 87,2007 137,2057 733,2057 v1(789,2001) ; 11.81,3269.64 509.8,3269.64 630.91,3390.75 ; 12.02,1692.59 108.59,1692.59 170,1754 177.57,1754 177.57,1850 ; 160.06,3631.04 cw(c162,3664.04) 160,3697.04 1420,3695.04 ; 160.06,3759.04 cw(c162,3792.04) 160,3825.04 1420,3823.04 ; 162,3759.04 1422,3761.04 cw(c1420,3728.04) 1421.94,3695.04 ; 162,3887.04 1422,3889.04 cw(c1420,3856.04) 1421.94,3823.04 ; 163,3631 632.46,3631 ; 243.57,1407.48 330.71,1407.48 ; 243.78,2658 243.78,2611.22 306,2549 1006,2549 1409.78,2952.78 1578,2952.78 1517.22,2952.78 ; 247,1670 318,1670 321.67,1673.67 329,1681 332.67,1684.67 346.61,1684.67 ; 248.43,1754 302,1754 331.96,1724.04 346.61,1724.04 ; 293.78,2658 v1@293.78,2722.78 ; v1@319.65,1704.35 346.61,1704.35 ; v1(320.3,1645.3) 346.61,1645.3 ; 342.57,1906 342.57,1863.43 350,1856 379,1856 411.57,1823.43 411.57,1789 ; 343.78,2658 343.78,2607.22 377.18,2573.82 971.82,2573.82 1508.26,3110.26 1578,3110.26 ; 346,1489.77 346,1624 ; 346.61,1664.98 410.98,1664.98 ; 346.61,1743.72 387.28,1743.72 403,1728 ; 362.43,998 362.43,1117.57 327.48,1152.52 327.48,1163.32 450.95,1286.79 450.95,1600.02 ; 372.21,1600.02 372.21,1557.79 409.43,1520.57 ; 391.89,1600.02 391.89,1645.89 407,1661 ; 393.78,2658 393.78,2617.22 413.56,2597.44 960.44,2597.44 1463,3100 1463,3261 ; 402.43,1493 407.35,1493.98 ; 402.43,1520.57 407.35,1493.98 ; 407.35,1399.98 407.35,1493.98 ; 413.43,1898.05 413.43,1917.37 ; 419.88,911.42 v1(490.16,911.42) ; 443.78,2658 443.78,2947.78 936,3440 1563.22,3440 1578,3425.22 1643.68,3425.22 1847.44,3221.46 1847.44,3168.31 v1(1847.44,2845.47) 1848.43,2846.46 1898.62,2846.46 ; 466,1005 466,1116 468,1118 513.32,1163.32 519.61,1163.32 470.63,1212.3 470.63,1600.02 ; 470.63,1789 470.63,1823.63 475,1828 490,1828 ; 490.31,1789 490.31,1827.68 ; 493.78,2658 493.78,2722 ; 494,2722 v1(1078,3306) 1078,3307 1078,3361 ; 511,1600.02 656.82,1600.02 680.9,1624.1 771.65,1624.1 791.34,1643.79 851.55,1643.79 ; 535.59,1704.35 568.65,1704.35 v1(571,1702) ; 535.59,1724.04 643.04,1724.04 692.04,1724.04 v1(816,1848) ; 535.59,1743.72 629.72,1743.72 673.72,1743.72 679,1749 v1(790,1860) ; 535.59,1763.41 547.41,1763.41 v1(591,1807) 570,1828 ; 543.78,2658 544,2658.22 v1(544,2728) ; v1(624,1785) 678,1785 v1(766,1873) ; 632,3497.05 632,3631 ; 701.77,1683.07 701.86,1683.16 851.55,1683.16 ; 760,1652 771.47,1663.47 851.55,1663.47 ; 761,1593 772.42,1604.42 851.55,1604.42 896.42,1604.42 ; 786.56,1325 946,1325 957,1336 957,1378 961.79,1382.79 961.79,1533.55 ; 787.56,1388 797.56,1378 852,1378 870,1378 942.1,1450.1 942.1,1533.55 ; 801,1178 914,1178 1008,1272 1008,1426.94 981.47,1453.47 981.47,1533.55 ; v1@801.18,1722.53 851.55,1722.53 ; v1@802.17,1624.1 851.55,1624.1 ; 851.55,1801.27 851.55,1890.45 851.55,2072.55 928,2149 928,2305 ; 870.56,1035 871.56,1034 946.47,1034 ; v1(875,1852) 875.45,1852.45 902.73,1852.45 902.73,1801.27 ; 902.73,1581.73 899.73,1584.73 902.73,1584.73 ; 922.42,1809.58 922.42,1852.45 ; 942.1,1852.45 942.1,1984.9 942.1,2046.1 1028,2132 1028,2305 ; 961.79,1852.45 961.79,1999.79 v1@963,2001 ; 981.47,1852.45 981.47,1908.47 986,1913 v1(986,1980) ; 1001.16,1533.55 1001.16,1463.84 1074,1391 1074,1258 1150,1182 1150,1167 ; 1001.16,1852.45 1001.16,1935.16 1001.16,1940.16 1128,2067 1128,2305 ; 1005.53,1034 1015,1034 1084.44,1034 1085.44,1035 ; 1020.84,1852.45 1020.84,1920.84 1020.84,1921.84 1228,2129 1228,2305 ; v1@1028,3305 1028,3361 1028,3336 ; v1(1050,1912) 1060,1902 1060,1865 ; 1080,1862 v1(1080,1912) ; 1099,1532.97 1099.58,1533.55 1099.58,1482.42 1123.68,1458.32 1575.05,1458.32 ; 1099.58,1852.45 1099.58,1901.58 v1(1110,1912) ; 1119.27,1801.27 1170.45,1801.27 v1@1263,1801.27 ; 1122.78,1537.06 1306.06,1537.06 1575.05,1537.06 ; 1127.58,1781.58 1170.45,1781.58 ; 1128,3361 1128,3438 ; 1130,1376 1174.31,1331.69 1263.78,1331.69 1283.46,1331.69 1296.26,1344.49 1296.26,1376.97 1315.94,1396.65 ; 1145.12,848.23 1156.3,848.23 1263.78,955.71 ; 1170.45,1584.73 1271.73,1584.73 1302.8,1615.8 1329.8,1615.8 1575.05,1615.8 ; 1170.45,1624.1 1225.9,1624.1 1250.1,1624.1 1320.54,1694.54 1571.35,1694.54 ; 1170.45,1643.79 1238.79,1643.79 1368.28,1773.28 1369.28,1773.28 1575.05,1773.28 ; 1170.45,1663.47 1229.47,1663.47 1418.02,1852.02 1419.02,1852.02 1575.05,1852.02 ; 1170.45,1722.53 1259.53,1722.53 1321,1784 1321,1809.47 ; 1170.45,1742.21 v1@1222,1742.21 ; 1178,3361 1178,3292 1206,3264 1574.26,3264 1578,3267.74 1563.26,3253 ; v1(1228,3285) 1470,3285 v1@1472,3283 ; v1@1228,3291 1228,3361 ; 1263.72,1390.81 v1@1263.72,1423.72 ; v1@1266,1426 1292,1426 1374,1426 1379,1421 1379,1388 1387.42,1379.58 1575.05,1379.58 ; v1(1276,3305) 1475,3305 1514,3344 1575.52,3344 1578,3346.48 ; 1328,3361 1330,3363 v1(1374,3363) ; 1503,2952.78 v1(1503,3066) ; v1@1726,1294 1800.3,1294 1830.3,1294 1865.73,1329.43 1865.73,1412 ; v1@1728,1294 1723,1289 1723,1253 1723,947 1764.49,905.51 2966.94,905.51 3006.32,944.88 3006.32,2204.72 2966.94,2244.09 2362.2,2244.09 2342.52,2263.78 1737.6,2263.78 1698.23,2224.41 1698.23,925.2 1737.6,885.83 2986.63,885.83 3026,925.2 3026,2224.41 2986.63,2263.78 2381.89,2263.78 2362.21,2283.46 1717.91,2283.46 1678.54,2244.09 1678.54,905.51 1717.91,866.14 3006.32,866.14 3045.68,905.51 3045.68,2244.09 3006.32,2283.46 2401.57,2283.46 2381.89,2303.15 2303.15,2303.15 1698.23,2303.15 1658.86,2263.78 1658.86,885.83 1698.23,846.46 3026,846.46 3065.37,885.83 3065.37,2263.78 3026,2303.15 2755.91,2303.15 ; v1@1746.3,1607 1747.3,1608 1794.87,1608 ; v1@1747.3,1700 1792.87,1700 ; 1754,1511 1722,1543 1722,1574 1722,1751.97 1762.03,1792 ; 1754.92,1511 1794.87,1511 ; 1761.81,1792 1793.87,1792 1793.87,1880 ; 1788.87,1517 1794.87,1511 ; 1794.87,1412 1794.87,1511 ; 1802.08,1779.53 1802.08,1811.02 ; 1821.85,2562.6 v1(1821.85,2613.19) ; 1847.44,2562.6 v1(1847.44,2613.19) ; 1857.2,1888.1 1859.3,1890.2 ; 1863.73,1700 1864.73,1701 1864.73,1880 1864.73,1945.57 1841.21,1969.09 1793.21,1969.09 1718.91,1969.09 1717.91,1970.08 1717.91,2204.72 1757.28,2244.09 v1(2322.83,2244.09) ; 1865.73,1410.57 1865.73,1608 ; 1953.74,2846.46 2243.11,2846.46 2296.26,2899.61 2548.23,2899.61 2635.83,2812.01 2671.52,2776.32 2710.24,2776.32 ; 2151.19,2410 2155.19,2410 ; 2341.54,2560.24 2605.12,2560.24 2618.11,2547.24 2618.11,2530.18 ; 2362.61,2513.86 2427.57,2513.86 ; 2370.49,2459.72 2433.48,2459.72 ; v1(2421.26,2303.15) 2775.59,2303.15 ; 2617.54,2458.74 2617.54,2529.61 ; 2969.11,2686.4 2972.87,2682.65 ; 3027.5,2649 3027.56,2648.94 ; 3027.98,2612.83 3028.98,2611.83 ; 3120.57,3255.72 3128.44,3263.6 ; 3121.49,1680.72 3129.36,1688.6 ; 3279.3,2494.68 3277.3,3754.68 cw(c3310.3,3752.68) 3343.3,3754.62 ; 3343.3,3752.68 3341.3,2492.68 ccw(c3374.3,2494.68) 3407.3,2492.74 ; 3407.3,2494.68 3405.3,3754.68 cw(c3438.3,3752.68) 3471.3,3754.62 ; 3471.3,3752.68 3469.3,2492.68 ccw(c3502.3,2494.68) 3535.3,2492.74 ; 3535.34,2495.68 3535.34,2749.02 3749.02,2749.02 3816.3,2816.3 3816.3,2846
  Top Layer w15.75: 90,41.96 479,41.96 ; 90,120.7 479,120.7 ; 90,199.44 479,199.44 ; 90,278.18 477.82,278.18 ; v1(337.6,1450.8) 337.6,1492.97 ; 405.51,1321.85 v1(405.51,1363.2) ; 590,41.96 979,41.96 ; 590,120.7 979,120.7 ; 590,199.44 979,199.44 ; 590,278.18 979,278.18 ; 801,1178 815.44,1163.56 815.44,1035 ; 1090,41.96 1479,41.96 ; 1090,120.7 1479,120.7 ; 1090,199.44 1479,199.44 ; 1090,278.18 1479,278.18 ; 1140.56,1035 1140.56,1172.56 1150,1182 ; 1670,41.96 2059,41.96 ; 1670,120.7 2059,120.7 ; 1670,199.44 2059,199.44 ; 1670,278.18 2059,278.18 ; v1@1795.28,2642.72 2174.21,2642.72 2202.76,2614.17 2235.24,2581.69 ; 2093.5,2406.5 2096.46,2406.5 2123.03,2379.92 2342.52,2379.92 2343.5,2380.91 2343.5,2410.24 ; 2100.59,2510.04 2171.26,2510.04 ; 2149.61,2565.58 v1(2149.61,2591.54) ; 2170,41.96 2559,41.96 ; 2170,120.7 2559,120.7 ; 2170,199.44 2559,199.44 ; 2170,278.18 2559,278.18 ; 2171.26,2410.04 2217.13,2410.04 ; 2318.9,2559.06 2318.9,2562.01 ; 2342.32,2409.45 2401.57,2409.45 ; v1(2396.65,2754.92) 2396.65,2835.63 ; v1(2507.87,2636.81) 2577.76,2636.81 2712.6,2636.81 2737.81,2611.6 2789.19,2611.6 ; v1@2508.28,2636.81 2508.28,2808.15 ; 2607.64,2687.01 2607.64,2641.38 2609.25,2639.76 ; 2617.54,2529.61 2618.11,2530.18 ; 2670,41.96 3059,41.96 ; 2670,120.7 3059,120.7 ; 2670,199.44 3059,199.44 ; 2670,278.18 3059,278.18 ; 2690.79,2686.4 2789.19,2686.4 ; 2710.24,2831.43 2711.24,2832.43 2911.24,2832.43 ; 2789.19,2649 3027.5,2649 ; 2838.58,2649 2838.58,2559.06 2861.22,2536.42 ; 2889.19,2611.6 2971.14,2611.6 ; 2889.19,2686.4 2969.11,2686.4 ; 2911.49,2832.68 v1(2948.82,2832.68) ; 2972.87,2693.47 2972.87,2749.65 2972.87,2848.85 3072.02,2948 3133.87,2948 3136.32,2945.56 ; 3027.56,2780.51 v1(3027.56,2831.69) ; 3027.98,2612.83 3027.98,2780.51 ; 3658.82,877 3658.82,1266 ; 3658.82,1377 3658.82,1766 ; 3658.82,1877 3658.82,2266 ; 3658.82,2957 3658.82,3346 ; 3658.82,3457 3658.82,3846 ; 3737.56,877 3737.56,1266 ; 3737.56,1377 3737.56,1766 ; 3737.56,1877 3737.56,2266 ; 3737.56,2957 3737.56,3346 ; 3737.56,3457 3737.56,3846 ; 3816.3,877 3816.3,1266 ; 3816.3,1377 3816.3,1766 ; 3816.3,1877 3816.3,2266 ; 3816.3,3457 3816.3,3846 ; 3895.04,877 3895.04,1266 ; 3895.04,1377 3895.04,1766 ; 3895.04,1877 3895.04,2266 ; 3895.04,2457 3895.04,2846 ; 3895.04,2957 3895.04,3346 ; 3895.04,3457 3895.04,3846
  Bottom Layer w11.81: 11.76,1377.88 227.29,1377.88 449.43,1600.02 650.22,1600.02 v1(752.95,1702.76) ; 11.76,1456.62 259.77,1456.62 435.04,1631.89 619.09,1631.89 643.7,1631.89 v1@694.39,1682.58 ; 11.81,3348.38 80.62,3348.38 294,3135 v1(294,2723) ; 11.81,3427.12 84.88,3427.12 541,2971 ; v1@319,1646.6 v1(319,1705) ; 363,2315.84 319,2271.84 319,1909 v1(319,1705) ; v1(490.16,911.42) 588.58,911.42 610.24,933.07 610.24,1531.5 v1(801.18,1722.44) ; v1(544,2728) 544,2968 ; 563,2309 630,2242 847,2242 1199,1890 1222,1867 v1(1222,1742) ; v1(571,1702) 624,1755 v1(624,1785) ; 655.91,870.08 655.91,1477.84 660.35,1482.28 v1(802.08,1624.02) ; 663,2315.84 824.16,2315.84 1223,1917 1241,1899 v1(1241,1762) ; v1@767,1873 854,1960 1065,1960 1110,1915 v1(1110,1912) ; v1@790,2001 v1(962,2001) ; v1@790.5,1859.5 867,1936 1057,1936 1080,1913 v1(1080,1912) ; v1(813,1981) v1@986,1981 ; v1(816,1848) 880,1912 v1(1050,1912) ; 855.91,870.08 904.53,870.08 1263,1228.55 v1(1263,1425) v1(1263,1802) ; v1(875,1852) 856,1852 811,1807 v1(591,1807) 489,1705 477,1705 v1(319,1705) ; v1(1028,3303) 1028,3302 1298,3032 1298.48,3031.52 1578,3031.52 ; v1@1076,3305 v1(1276,3305) ; v1(1374,3363) 1397,3363 1453,3307 1453,3115 1502,3066 v1(1503,3066) ; v1(1474,3285) 1474,3222 1509,3187 ; 1508,3187 1509,3187 ; 1549.94,1537.06 1575.05,1537.06 ; 1575.05,1300.84 1583.89,1292 v1(1726,1292) ; 1575.05,1458.32 1670.92,1458.32 1771.65,1559.06 1771.65,1577.76 1771.65,1665.35 1834.25,1727.95 1866.14,1727.95 ; 1576,3187 1509,3187 ; 1578,3346.48 1654.5,3346.48 1821.85,3179.13 v1(1821.85,2613.19) ; 1592.18,1379.58 1575.05,1379.58 1628.6,1379.58 1877.36,1628.35 1880.91,1628.35 ; 1595,1700 v1(1745.3,1700) ; 1602,1538 1638.8,1574.8 1658.86,1574.8 v1@1722,1574.8 ; 1603,1608 v1(1746.3,1608) ; v1(1847.44,2613.19) v1(1847.44,2845.47) ; 1864.57,1628.35 1866.14,1628.35 ; 1880.91,1429.13 1880.91,1000 1888.78,992.13 2892.72,992.13 2940.94,1040.35 2940.94,1252.95 2943.9,1255.91 3066.55,1378.56 3137.24,1378.56 ; 1880.91,1528.74 1853.54,1528.74 1807.09,1482.28 1807.09,962.6 1833.66,936.02 2918.31,936.02 2977.36,995.08 2977.36,1199.8 2977.36,1212.6 3064.58,1299.82 3137.24,1299.82 ; v1(2322.83,2244.09) 2344.09,2244.09 2401.57,2301.57 ; 2401.57,2303.15 v1(2421.26,2303.15) ; 3090.93,1614.78 3137.24,1614.78
  Bottom Layer w15.75: v1(337.6,1450.8) 337.6,1431.12 v1(405.51,1363.2) ; 1427.99,2305 1427.99,1397.01 1445.42,1379.58 ; 1898.62,2502.95 2061.02,2502.95 2312.99,2754.92 v1(2396.65,2754.92) ; 2401.57,2409.45 2507.87,2515.75 v1(2507.87,2636.81) ; v1@2950.79,2832.68 v1@3026.57,2832.68 ; v1(3027.56,2831.69) 3062.68,2866.82 3136.32,2866.82 ; 3095.32,3024 3124.32,3024
  other v1: 1678.15,1574.8 1722,1575 693.9,1683.07 1796.26,2641.73
  other v2: 292.14,841.87 382.69,841.87
  other v3: 2828.74,2427.17 2946.85,2427.17

## Polygon pours and split planes (outlines as drawn)
GND on Bottom Layer "GND_L02_P017" (solid, pour order 17): 0.43,786.78 1562.93,786.78 1562.93,3462.6 0,3462.6 0,787.2
GND on Top Layer "GND_L01_P019" (solid, pour order 19): 0.01,3462.47 1562.63,3462.72 1562.63,787.4 0.38,787.4 0,787.78

## Keep-outs
Keep-Out Layer:
  lines w11.81: 0,787.2 3936,787.2 ; 0,2362.2 3936,2362.2 ; 1574.8,1 1574.8,3937.01 ; 3149.61,-1 3149.61,787.4 3149.61,3940.94

## Other copper
Top Layer:
  rectangle net GND: 1507.87,1278.54 1538.39,1322.83
  rectangle net VCC5.0: 2217.52,2410.43 2296.26,2569.88
  rectangle net GND: 1511.81,2852.36 1542.32,2895.67
  pour cut-out: 306.1,1458.66 305.12,1457.68 305.12,1441.93 359.25,1441.93 368.11,1450.79 368.11,1467.52
  pour cut-out: 1508.86,2601.38
  pour cut-out: 897.64,2375.98 899.61,2377.95 899.61,2598.43 1512.8,2598.43 1512.03,2597.66 1512.03,2362.88
  pour cut-out: 1015.75,1905.51 1228.35,2118.11 1228.35,2352.36 1221.46,2359.25 920.28,2359.25 920.28,2156.72 928,2149 851.55,2072.55 851.55,1818.19 844.7,1811.34
  pour cut-out: 520.67,1958.66 554.13,1925.2 554.13,1794.29 592.52,1755.91 779.53,1755.91 851.38,1827.76 851.38,1978.35 782.48,1978.35 777.56,1983.27
  region: 1533.96,1321.85
  region: 2205.71,2621.06 2256.89,2569.88 2313.98,2569.88
  region net VCC5.0: 2217.52,2569.88 2313.98,2569.88 2199.8,2606.3
  region net VCC5.0: 2299.21,2410.43 2225.39,2410.43 2217.52,2402.56
  region net VCC5.0: 2313.98,2569.88
  region net VCC5.0: 2313.98,2569.88
  region net VCC5.0: 2313.98,2550.2 2294.29,2530.51 2286.42,2530.51 2271.65,2569.88 2313.98,2569.88
  pour cut-out: 3078.15,3460.25 3086.03,3452.37 3086.03,2833.88 3135.06,2833.88 3141.73,2840.55 3141.73,3467.52
  pour cut-out: 63.5,3464.56 63.5,2837.02 61.47,2835 59.86,2836.61 -11.81,2836.61 -11.81,3461.61 -9.84,3463.58
  pour cut-out: 1512.03,1890.44 1512.03,1258.24 1512.02,1258.22 1638,1258.22 1638,1890.43 1638.02,1890.44
  pour cut-out: 901.83,1585.63 902.73,1584.73 902.56,1504.92 1118.11,1504.92 1120.08,1506.89 1119.09,1507.87 1119.09,1585.63 1169.55,1585.63 1170.45,1584.73 1170.45,1801.27 1119.27,1801.27 1119.27,1852.45 902.73,1852.45 851.55,1801.27 851.55,1584.73
  pour cut-out: -19.69,1247.05 -9.84,1256.89 75.79,1256.89 75.79,1889.76 69.88,1895.67 -27.56,1895.67
  pour cut-out: 339.33,1775.87 523.13,1775.87 535.59,1763.41 526.3,1754.12 526.3,1600.02 345.1,1600.02 344.49,1599.41
  pour cut-out: 87,2007 137,2057 733,2057 789,2001 789,1970.84 789.37,1970.47 780.9,1962 147,1962 147,1950.15 102.36,1905.51 99.41,1908.46 84.65,1908.46
  pour cut-out: 1578,3110.26 1578,2952.78 1409.78,2952.78 1009.17,2552.17 302.83,2552.17 241.14,2613.86 241.14,2643.7 540.35,2643.7 597.44,2586.61 966.54,2586.61 1474.41,3094.49
  pour cut-out: 1329.72,3342.52 1319.88,3332.68 1319.88,3275.59 1191.93,3275.59 1175.2,3292.32 1175.2,3338.58 1092.52,3338.58 1062.99,3309.06 1062.99,3291.34 1039.66,3291.34 1020.67,3310.33 1020.67,3339.57
  pour cut-out: 544,2728 544,2681.39 552.17,2673.23 539.37,2660.43 483.27,2660.43 483.27,2728.35 500.98,2746.06 524.61,2746.06
  pour cut-out: 490,1828 575.54,1828 618.54,1785 664.8,1785 675.2,1774.61 675.2,1724.41 575.33,1724.41 519.36,1668.44 519.36,1606.66 507.25,1606.66 456.69,1556.1 456.69,1299.21 464.57,1291.34 359.25,1291.34 359.25,1529.53 346.61,1542.17 346.61,1645.3 313.36,1645.3 271.65,1687.01 272.64,1687.99 272.64,1742.19 284.45,1754 288.45,1750 336.61,1750
  pour cut-out: 287.4,1685.04 196.85,1685.04 125.91,1614.1 48.3,1614.1 39.37,1623.03 50.2,1633.86 50.2,1695.87 105.32,1695.87 108.59,1692.59 159.11,1743.11 284.45,1743.11 287.4,1740.16
  pour cut-out: 107.28,1868.11 98.54,1859.37 98.54,1778.54 68.13,1778.54 65.32,1775.73 65.32,1850.32 87,1872
  pour cut-out: 754.92,1370.08 757.87,1367.13 757.87,1329.72 946.79,1329.72 948.76,1327.76 961.79,1340.79 961.79,1442.74 955.71,1448.82 941.93,1435.04 909.04,1435.04 852,1378
  pour cut-out: 774.61,1654.53 792.32,1636.81 792.32,1627.95 820.87,1656.5
  pour cut-out: 829.72,1851.38 808.14,1829.79 808.14,1818.97 825.37,1801.75 851.38,1827.76 860.24,1827.76
  pour cut-out: 1537.89,1852.02 1292.97,1852.02 1253.94,1812.99 1219.49,1812.99 1079.72,1673.23 1079.72,1555.12 1020.67,1496.06 1174.31,1342.43 1343.6,1342.43 1363.19,1322.84 1538.43,1322.83
  pour cut-out: 1347.44,1194.88
  pour cut-out: 1029.53,1430.12 1034.88,1430.12 1074,1391 1135.83,1329.17 1135.83,1054.13 1118.11,1054.13 1071.26,1007.28 844.81,1007.28 818.9,1033.2 818.9,1149.61 844.49,1175.2 911.2,1175.2 1008,1272 1008,1426.94
  pour cut-out: 970.85,1346.5 995.13,1346.5 999.02,1350.39 999.02,1440.94 963.58,1440.94 958.75,1445.78
  pour cut-out: 1150,1167 1170.99,1187.99 1264.76,1187.99 1264.76,1336.61 1196.42,1404.96 1060.04,1404.96 1060.04,1223.43 1072.83,1210.63
  pour cut-out: 545.28,1606.3 546.26,1607.28 670.28,1607.28 695.37,1632.38 792.32,1632.38 792.32,1643.61 851.55,1702.84 822.83,1731.56 822.83,1826.77 736.22,1826.77 653.17,1743.72 535.59,1743.72
  pour cut-out: 1638,3463.78 1638,2835.44 1637.81,2835.63 1530.51,2835.63 1530.51,3500.98 1549.21,3519.68
  pour cut-out: 1557.09,3104.33 1552.76,3100 1463,3100 1463,3261 1475,3273 1475,3323.82 1493.82,3323.82 1539.13,3369.14
Bottom Layer:
  rectangle net GND: 1505.91,1278.73 1538.39,1322.83
  rectangle net GND: 1516.73,2852.36 1559.06,2895.67
  pour cut-out: 1512.8,2598.43 1512.8,2363.65 1511.35,2362.2 897.64,2362.2 897.64,2596.46 899.61,2598.43
  pour cut-out: 1583.89,1335.63 1583.89,1258.22 1638,1258.22 1638,1335.63
  pour cut-out: 3085.03,3464.22 3087.01,3462.24 3087.01,2834.44 3150,2834.44 3148.02,2836.42 3148.02,3464.22
  pour cut-out: 61.47,2835 61.47,3462.54 61.54,3462.6 0,3462.6 0,2840.55 -1.97,2838.58
  pour cut-out: 62,1889.78 63.97,1887.81 63.97,1260.78 0.98,1260.78 -1.97,1263.72 -1.97,1889.22
  pour cut-out: 1512.03,1890.44 1512.53,1258.22 1638,1258.22 1638,1890.43
  pour cut-out: 875.98,2252.95 824.16,2304.78 824.16,2315.84 674.11,2315.84 673.23,2314.96 643.7,2344.49 643.7,2359.25 562.01,2359.25 559.06,2356.3 565.94,2349.41 565.94,2301.18 570.82,2301.18 630,2242 847,2242
  pour cut-out: 1503.94,1365.16 1513.78,1355.32 1513.78,1363.19 1516.73,1366.14
  pour cut-out: 1638,2835.44 1531.68,2835.44 1530.51,2836.61 1530.51,3500.98 1621.06,3500.98 1637.8,3484.25
  pour cut-out: 1491.14,3200.79 1504.93,3187 1553.16,3187 1561.02,3179.13 1545.28,3163.39 1545.28,3029.53 1510.83,3029.53 1502,3038.35 1502,3066 1453,3115 1456.69,3118.69 1456.69,3212.6

## Silkscreen, mask and mechanical layers (free items; w line width, h text height)
Top Overlay:
  lines w11.81: 1673.23,2893.7 1673.23,3877.95 3051.18,3877.95 3051.18,2893.7 1673.23,2893.7
  text "+" at 2551.18,2869.09 h60 r180
  text "1" at 246,2713 h60 r90
  text "CLK" at 908,2246 h39.37 r270
  text "DIO" at 1008,2246 h39.37 r270
  text "RX" at 1109,2246 h39.37 r270
  text "TX" at 1209,2246 h39.37 r270
  text "GND" at 1309,2246 h39.37 r270
  text "V3.3" at 1408,2246 h39.37 r270
Top Solder:
  rectangle: 2217.52,2424.21 2296.26,2546.26
  lines w11.81: 631.89,3497.05 631.89,3505.91
Drill Drawing:
  lines w11.81: -8,0 3929.01,0 ; -3,0 -3,3937.01 ; 0,3937.01 3937.01,3937.01

## Text inside footprints (layer, text, board x,y; h text height)
CC1101: Top Overlay "E07-M1101S" at 443.78,2776.11 h60 r90
RF: Top Overlay "E01-ML01SP2" at 1123,3207 h70 r270